# Altium PCB 调偏电路.PcbDoc
Units mm, origin at the board's own origin, x right, y up, seen from the top; angles counter-clockwise.
Board outline 40 x 27 mm, 2 copper layers (Top Layer, Bottom Layer); 21 components, 10 nets, 55 pads, 9 vias.
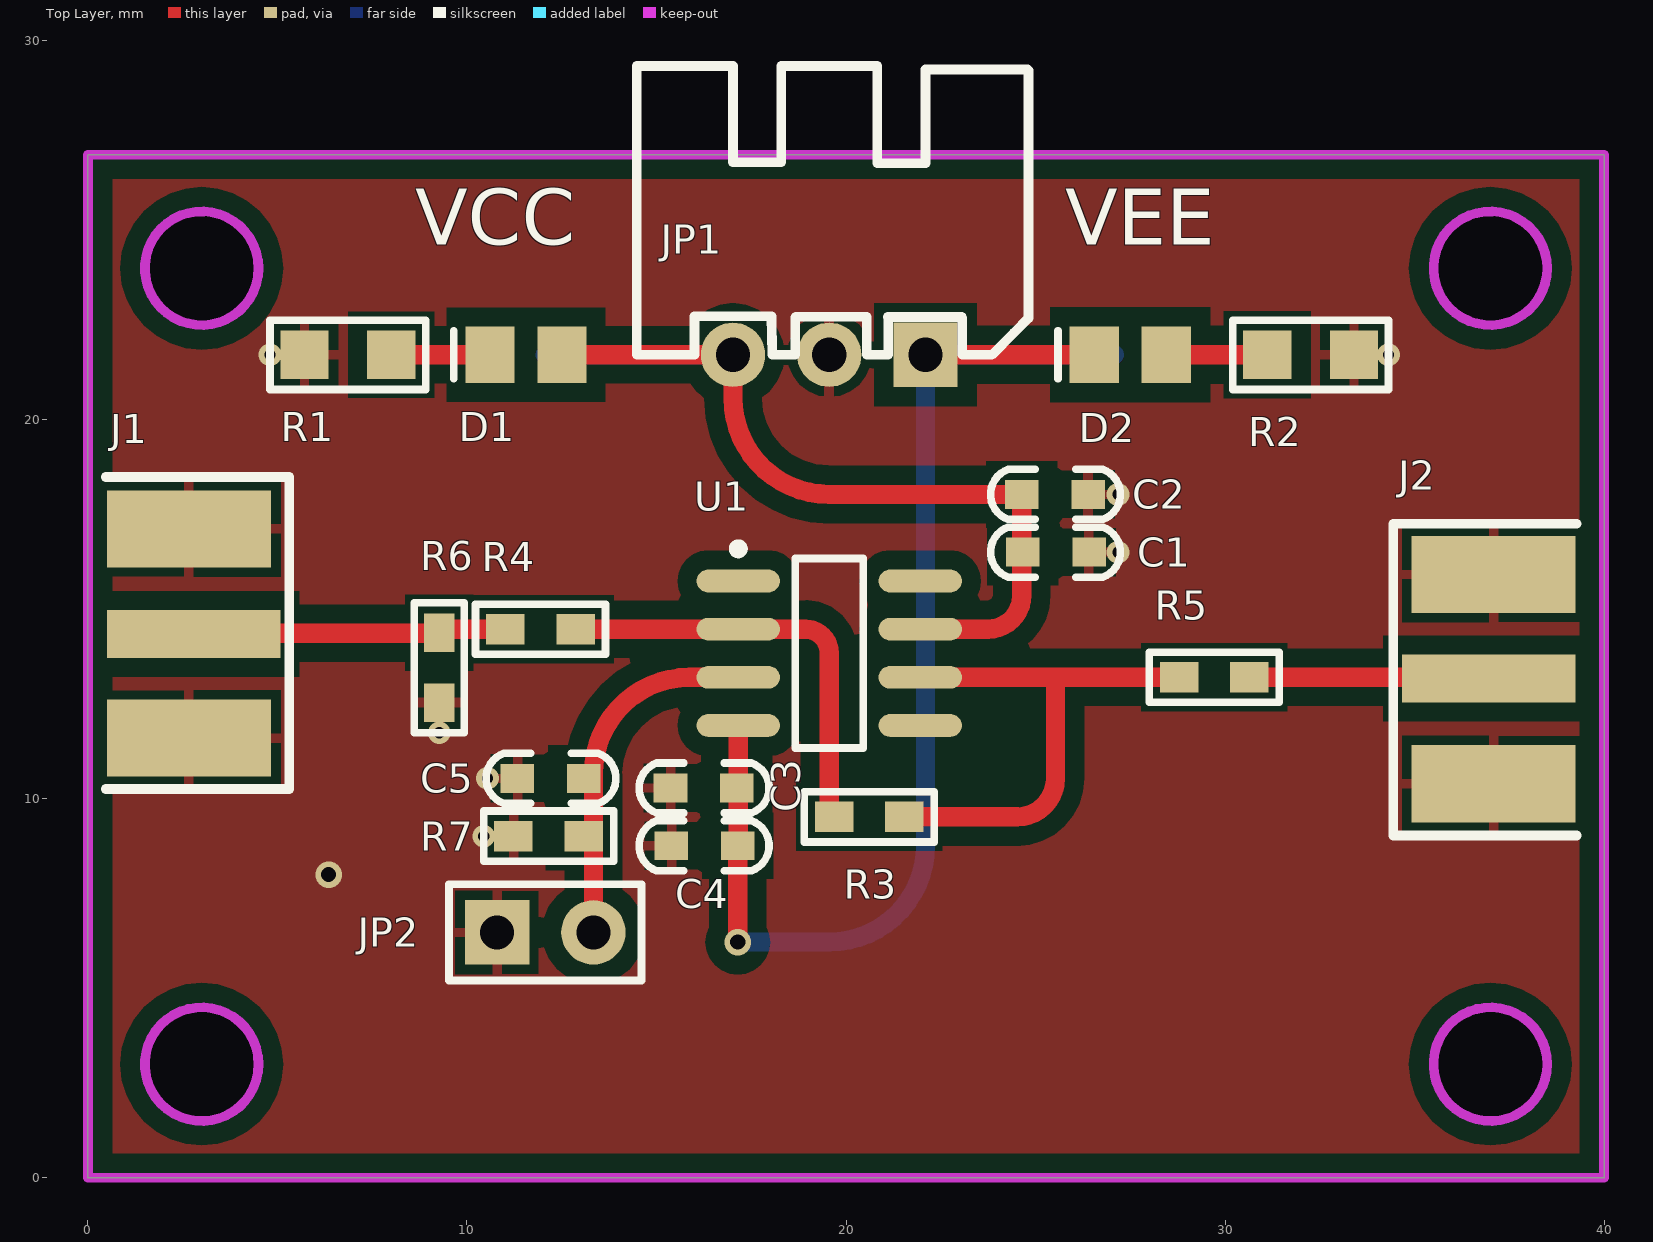
[diagram p0: Top Layer view]
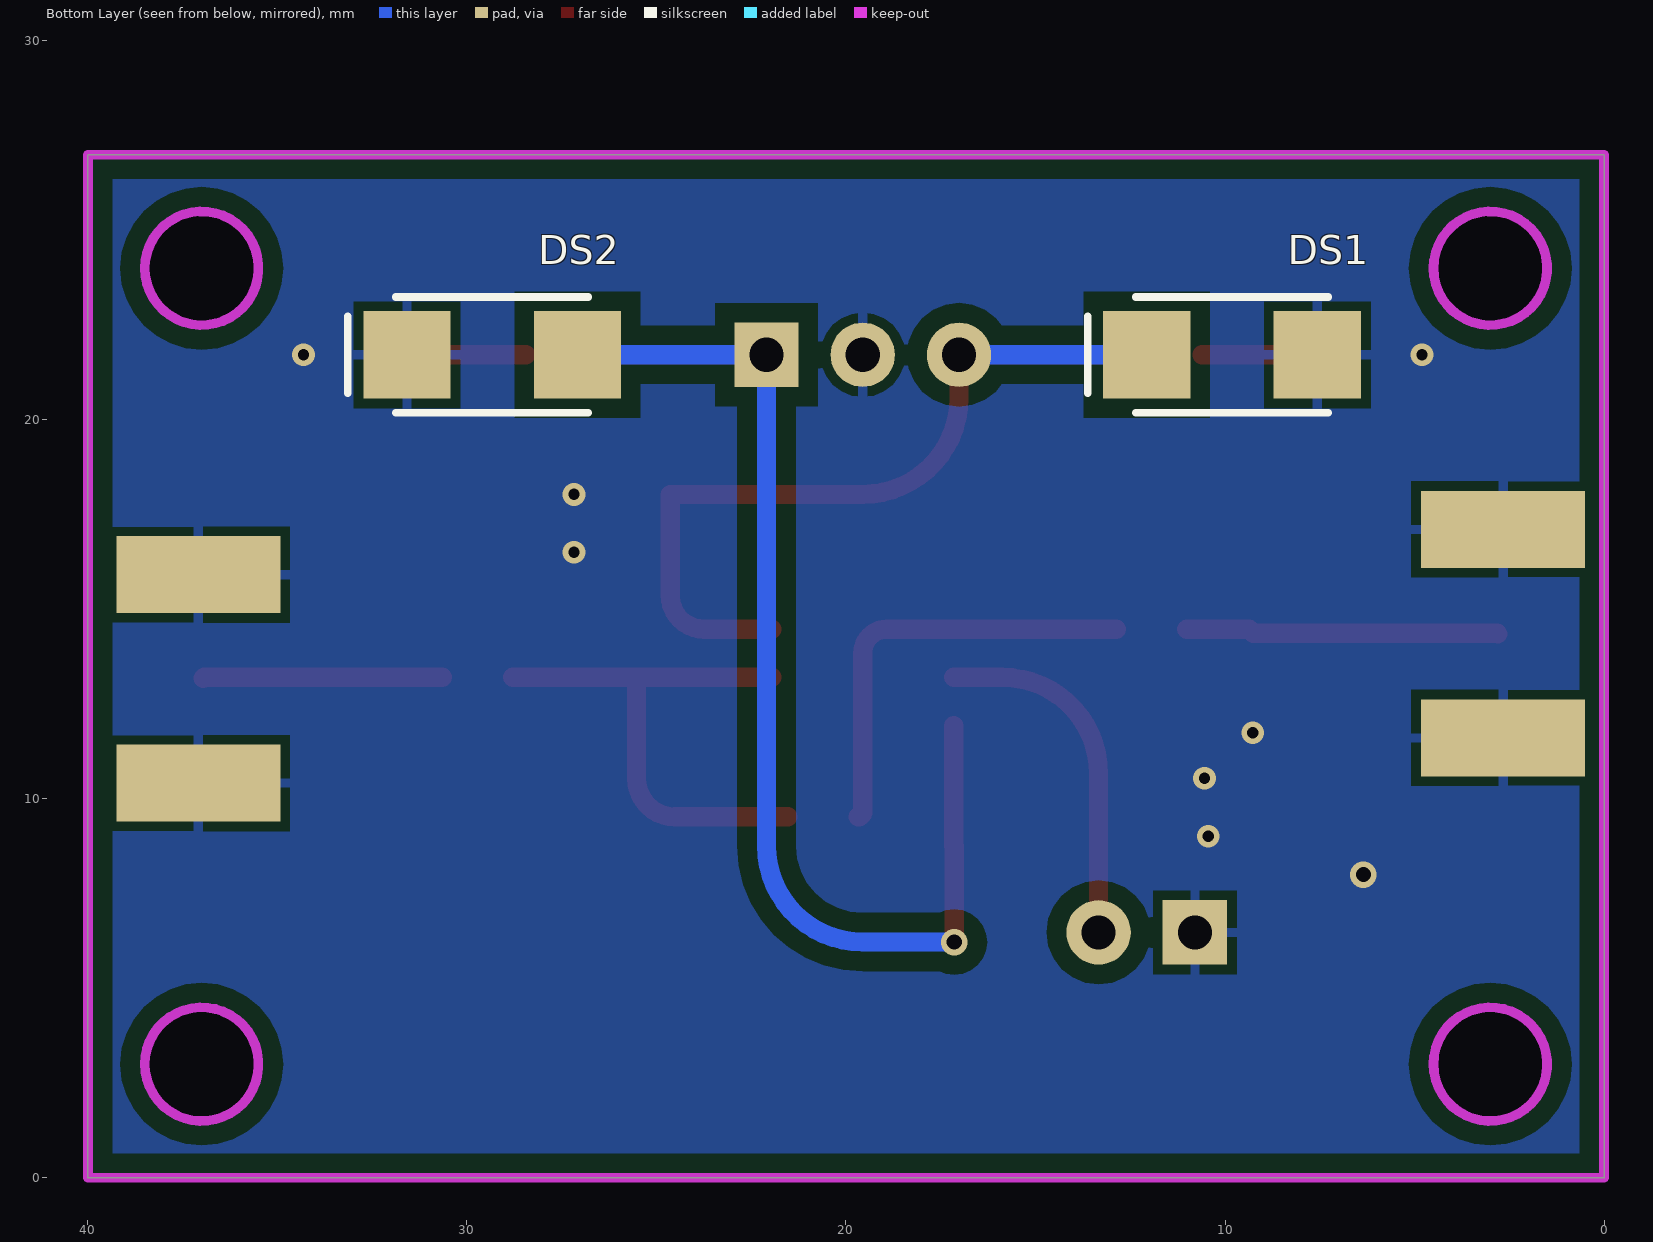
[diagram p1: Bottom Layer view, seen from below]

## Layer stack, top to bottom
Top Solder: solder mask 0.0102, Solder Resist, Dk 3.5
Top Layer: signal copper 0.0356
Dielectric 1: dielectric 0.32, FR-4, Dk 4.8
Bottom Layer: signal copper 0.0356
Bottom Solder: solder mask 0.0102, Solder Resist, Dk 3.5

## Board outline
0,0 40,0 40,27 0,27
cut-out: 3,22.5 cw(c3,24) 1.5,24 cw(c3,24) 3,25.5 cw(c3,24) 4.5,24 cw(c3,24)
cut-out: 35.5,24 ccw(c37,24) 37,22.5 ccw(c37,24) 38.5,24 ccw(c37,24) 37,25.5 ccw(c37,24)
cut-out: 35.5,3 ccw(c37,3) 37,1.5 ccw(c37,3) 38.5,3 ccw(c37,3) 37,4.5 ccw(c37,3)
cut-out: 3,1.5 cw(c3,3) 1.5,3 cw(c3,3) 3,4.5 cw(c3,3) 4.5,3 cw(c3,3)

## Design rules (kind name [scope] priority, off if disabled: settings)
Clearance [All] p1: gap=0.254 ignorepadtopadclearanceinfootprint=FALSE except(0: Arc-Hole Track-Hole SMDPad-Hole THPad-Hole Via-Hole Fill-Hole Poly-Hole Region-Hole Text-Hole; 0.508: Arc-Poly Track-Poly SMDPad-Poly THPad-Poly Via-Poly Fill-Poly Poly-Poly)
MinimumSolderMaskSliver [All] p1: minsoldermaskwidth=0
PlaneConnect [All] p1: planeconnectstyle=Direct reliefexpansion=0.508 reliefentries=4 reliefconductorwidth=0.254 reliefairgap=0.254
PolygonConnect [All] p1: thpad.connectstyle=Relief thpad.reliefconductorwidth=0.254 thpad.reliefentries=4 thpad.polygonreliefangle="90 Angle" thpad.airgapwidth=0.254 smdpad.connectstyle=Relief smdpad.reliefconductorwidth=0.254 smdpad.reliefentries=4 smdpad.polygonreliefangle="90 Angle" smdpad.airgapwidth=0.254 via.connectstyle=Direct via.reliefconductorwidth=0.254 via.reliefentries=4 via.polygonreliefangle="90 Angle" via.airgapwidth=0.254
RoutingVias [All] p1: holewidth=0.711 width=1.524 viastyle="Through Hole" minholewidth=0.3 minwidth=0.6 maxholewidth=0.711 maxwidth=1.778
SilkToSilkClearance [All] p1: silktosilkclearance=0
SilkToSolderMaskClearance [IsPad] p1: minsilkscreentomaskgap=0 clearancetoexposedcopper=TRUE
SolderMaskExpansion [All] p1: expansion=0.102
Width [All] p1: maxlimit=2.54 minlimit=0.025 preferedwidth=0.254
26 further rules are at their usual default settings.

## Components (designator, comment, footprint, x,y, rotation, side; value= is the part's Value field where it differs from the comment)
C1 "104" "C 0603" 25.527,16.51 r180 top
C2 "1uF" "C 0603" 25.527,18.034 r0 top
C3 "104" "C 0603" 16.256,10.287 r0 top
C4 "1uF" "C 0603" 16.256,8.763 r180 top
C5 "104" "C 0603" 12.217,10.541 r0 top
D1 "LED" LED_0805 11.557,21.717 r180 top
D2 "LED" LED_0805 27.498,21.717 r180 top
DS1 "D Schottky" DIODE-SMA 9.815,21.717 r0 bottom
DS2 "D Schottky" DIODE-SMA 29.337,21.717 r0 bottom
J1 "COAX" MCX5.08-5-H 2.794,14.351 r0 top
J2 "COAX" MCX5.08-5-H 36.957,13.174 r180 top
JP1 "HDR-1X3" XH2.54-3P_H 22.098,21.717 r180 top
JP2 "HDR-1X2" HDR-1X2 10.795,6.477 r0 top
R1 "1K" "R 0805" 6.858,21.717 r180 top
R2 "1K" "R 0805" 32.258,21.717 r180 top
R3 "200" "R 0603" 20.612,9.525 r0 top
R4 "50" "R 0603" 11.938,14.478 r0 top
R5 "50" "R 0603" 29.718,13.208 r0 top
R6 "50" "R 0603" 9.271,13.462 r90 top
R7 "1K" "R 0603" 12.154,9.017 r0 top
U1 "OPA690" SOIC8_N 19.558,13.843 r0 top

## Footprints (in the part's own frame and the unit in brackets; to place one, negate y for a bottom-side part, rotate by r counter-clockwise, add the part's x,y. Pads: shape width x height; smd on the part's side, far side on the other; paste and mask are expansions set on the pad)
"C 0603" [mil] "无极性贴片电容"
  rect 35x30 smd: 1(-35,0) 2(34,0)
  silkscreen extent -67,-26 67,26, body extent -31,-16 31,16, height 32
DIODE-SMA [mm] "贴片二极管"
  rect 2.3x2.3 smd: 1(-2.25,0) 2(2.25,0)
  silkscreen extent -2.54,-1.52 3.81,1.52, body extent -2.92,-1.4 2.92,1.4, height 3
HDR-1X2 [mm] "排针，2脚"
  rect 1.7x1.7 hole 0.9: 1(0,0)
  round 1.7 hole 0.9: 2(2.54,0)
  silkscreen extent -1.27,-1.27 3.81,1.27, body extent -1.27,-1.27 3.81,1.27, height 8.5
LED_0805 [mm] "贴片二极管"
  rect 1.3x1.5 smd: 1(-0.95,0) 2(0.95,0)
  silkscreen extent 1.91,-0.63 1.91,0.64
MCX5.08-5-H [mil]
  rect 180x50 smd: 1(0,0)
  rect 170x80 smd: 2(-5,109.25) 5(-5,-108.27)
  rect 170x80 smd far side: 3(-5,108.66) 4(-5,-107.87)
  silkscreen extent -92,-161 99,163, body extent -93,-132 80,134, height 39
"R 0603" [mil] "1/10W贴片电阻"
  rect 40x31.5 smd: 1(-36.5,0) 2(36.5,0)
  silkscreen extent -68,-26 68,26, body extent -31,-16 32,16, height 16
"R 0805" [mil] "1/8W贴片电阻"
  rect 50x50 smd: 1(-45,0) 2(45,0)
  silkscreen extent -81,-36 81,36, body extent -39,-25 39,25, height 20
SOIC8_N [mm] "8-Pin Small Outline Integrated Circuit Package (SOIC8), IPC Medium Density"
  oval 2.2x0.6 smd: 1(-2.4,1.905) 2(-2.4,0.635) 3(-2.4,-0.635) 4(-2.4,-1.905) 5(2.4,-1.905) 6(2.4,-0.635) 7(2.4,0.635) 8(2.4,1.905)
  silkscreen extent -2.52,-2.5 0.9,2.88, body extent -1.95,-2.45 1.95,2.45, height 1.75
XH2.54-3P_H [mm] "接插件，3P"
  rect 1.7x1.7 hole 0.9: 1(0,0)
  round 1.7 hole 0.9: 2(2.54,0) 3(5.08,0)
  silkscreen extent -2.72,-7.62 7.62,0, body extent -2.5,-7.35 7.58,0.35, height 5.73

## Part data
C1 C2 C3 C4 C5: library part C, "无极性贴片电容"
D1 D2: "发光二极管", LatestRevisionDate=08-Jul-2005, LatestRevisionNote="Mech Layer 1 removed.", PackageReference=LED, Published=8-Jun-2000, Publisher="Altium Limited"
DS1 DS2: "Schottky Diode", Code_JEDEC=DO-214-AA, LatestRevisionDate=17-Jul-2002, LatestRevisionNote="Re-released for DXP Platform.", PackageDescription="DO-214-AA/SMB; 2 C-Bend Leads; Body 5.3 x 3.6 mm, inc. leads (LxW)", PackageReference=SMB, Published=8-Jun-2000, Publisher="Altium Limited"
JP1: library part "Header 3", "3P接插件", BOM名称=3P接, 学习资源=www.ooocke.
JP2: library part "Header 2", "2P接插件", BOM名称=2P接, 学习资源=www.ooocke.
R1 R2 R3 R4 R5 R6 R7: library part R, "贴片电阻"
U1: library part OPA690ID, "具有禁用功能的宽带电压反馈运算放大器"

## Via types
v1: diameter 0.6, hole 0.3, Top Layer to Bottom Layer, tented both sides, 7 vias
v2: diameter 0.7, hole 0.4, Top Layer to Bottom Layer, 2 vias

## Nets (pads, with @x,y where several pads share a name; then routed paths per layer and width w, separated by ;. In a path a pad name is that pad's centre, name@x,y a point inside that pad or via, vN(x,y) a via of type N, cw(c..) or ccw(c..) an arc to the next point about the centre after c; other vN are vias at no path point)
GND: C1.1 C2.2 C3.1 C4.2 C5.1 DS1.1 DS2.2 J1.2 J1.3 J1.4 J1.5 J2.2 J2.3 J2.4 J2.5 JP1.2 JP2.1 R1.2 R2.1 R6.1 R7.1
  other v1: 10.439,9.017 10.541,10.541 9.271,11.747 27.178,16.51 27.178,18.034 4.801,21.717 34.315,21.717
  other v2: 6.35,8.001
NetC5_2: C5.2 JP2.2 R7.2 U1.3 | length 9.5
  Top Layer w0.508: JP2.2 13.335,10.668 cw(c15.875,10.668) 15.875,13.208 U1.3
NetD1_2: D1.2 R1.1 | length 2.6
  Top Layer w0.508: R1.1 D1.2
NetD2_1: D2.1 R2.2 | length 2.7
  Top Layer w0.508: D2.1 R2.2
NetJ1_1: J1.1 R4.1 R6.2 | length 8.3
  Top Layer w0.508: J1.1 2.813,14.37 9.252,14.37 R6.2 9.36,14.478 R4.1
NetJ2_1: J2.1 R5.2 | length 6.3
  Top Layer w0.508: R5.2 36.923,13.208 cw(c36.923,13.174) J2.1
NetR3_1: R3.1 R4.2 U1.2 | length 11.4
  Top Layer w0.508: R4.2 U1.2 18.923,14.478 cw(c18.923,13.843) 19.558,13.843 19.558,9.652 ccw(c19.685,9.652) R3.1
NetR3_2: R3.2 R5.1 U1.6 | length 14.2
  Top Layer w0.508: R3.2 24.511,9.525 ccw(c24.511,10.541) 25.527,10.541 25.527,13.055 ccw(c25.374,13.055) 25.374,13.208 ; U1.6 25.374,13.208 ; R5.1 25.374,13.208
VCC: C1.2 C2.1 D1.1 DS1.2 JP1.3 U1.7 | length 25.5
  Top Layer w0.508: D1.1 JP1.3 17.018,20.574 ccw(c19.558,20.574) 19.558,18.034 C2.1 24.638,15.367 cw(c23.749,15.367) 23.749,14.478 U1.7
  Bottom Layer w0.508: DS1.2 JP1.3
VEE: C3.2 C4.1 D2.2 DS2.1 JP1.1 U1.4 | length 34.5
  Top Layer w0.508: v2(17.145,6.223) C4.1 17.158,8.763 U1.4 ; JP1.1 D2.2
  Bottom Layer w0.508: v2(17.145,6.223) 19.558,6.223 ccw(c19.558,8.763) 22.098,8.763 JP1.1 DS2.1
pads on no net: U1.1 U1.5 U1.8

## Polygon pours and split planes (outlines as drawn)
GND on Bottom Layer "Top Layer-No Net1" (solid, remove dead copper, pour order 1): 0,0 40,0 40,27 0,27
GND on Top Layer "Top Layer-No Net" (solid, remove dead copper, pour order 0): 0,0 40,0 40,27 0,27

## Keep-outs
Keep-Out Layer:
  circle w0.254: c3,3 r1.5
  circle w0.254: c37,3 r1.5
  circle w0.254: c37,24 r1.5
  circle w0.254: c3,24 r1.5
  lines w0.254: 0,0 0,27 40,27 40,0 0,0

## Silkscreen, mask and mechanical layers (free items; w line width, h text height)
Top Overlay:
  text "VCC" at 8.636,24.13 h2.54
  text "VEE" at 25.781,24.13 h2.54